# EAGLE board Control LED Brightness using UART Communication (EAGLE 9.7.0)

Size 219.42 x 117.08 mm. Coordinates in mm from the lower left corner, seen from the top.
Outline: 0,0 219.42,0 219.42,117.08 0,117.08 0,0
Copper layers (1*16): Top 0.035mm / dielectric 1.5mm / Bottom 0.035mm
Design rules "default": minimum track width 6mil, minimum drill 0.35mm, track to track 6mil, track to pad 6mil, pad to pad 6mil, via to via 6mil, smd to smd 6mil, copper to edge 40mil, drill to drill 6mil, minimum pad ring 10mil, minimum via ring 8mil, stop-mask expansion 4mil, vias tented up to drill 0mil, thermal gap 10mil

## Footprints (pad centres in the part's own frame; a part is rotated, then mirrored left to right if it is on the bottom)
LEDRD254W60D565H860B_B = drill 0.981 pad 1.581: 1 -1.27,0; 2 1.27,0
HA-06-SM065 = drill 1 pad 1.676: 1 -2.54,-2.54; 2 0,2.54; 3 2.54,-2.54
RESAD1016W63L850D250B = drill 0.83 pad 1.43: 1 -5.08,0; 2 5.08,0
ARDUINO-UNO-R3-SHIELD = drill 1.016 pad 1.88: 3.3V 24.13,-2.54; 5V 24.13,0; A0 24.13,12.7; A1 24.13,15.24; A2 24.13,17.78; A3 24.13,20.32; A4 24.13,22.86; A5 24.13,25.4; AREF -24.13,-13.97; D2 -24.13,20.32; D3 -24.13,17.78; D4 -24.13,15.24; D5 -24.13,12.7; D6 -24.13,10.16; D7 -24.13,7.62; D8 -24.13,3.81; D9 -24.13,1.27; D10 -24.13,-1.27; D11 -24.13,-3.81; D12 -24.13,-6.35; D13 -24.13,-8.89; GND@0 24.13,2.54; GND@1 24.13,5.08; GND@2 -24.13,-11.43; IOREF 24.13,-7.62; NC 24.13,-10.16; RES 24.13,-5.08; RX -24.13,25.4; SCL -24.13,-19.05; SDA -24.13,-16.51; TX -24.13,22.86; VIN 24.13,7.62

## Placement (x,y rotation side)
DLED  BLUE  [LEDRD254W60D565H860B_B]  115.53,109.17 180 top
RPOTPOTENTIOMETER  10k  [HA-06-SM065]  68.54,96.47 0 top
RRESISTOR  150  [RESAD1016W63L850D250B]  114.26,86.31 90 top
URECEIVER  ARDUINO-UNO-R3-SHIELD  [ARDUINO-UNO-R3-SHIELD]  184.9,29.84 270 top
UTRANSMITTER  ARDUINO-UNO-R3-SHIELD  [ARDUINO-UNO-R3-SHIELD]  47.88,30.13 270 top

## Library data of the parts
DLED = Tinkercad; CATEGORY: Opto-Electronic; SUB-CATEGORY: LED; VALUE: LED_BLUE
RPOTPOTENTIOMETER RRESISTOR URECEIVER UTRANSMITTER = Tinkercad

## Nets
DLED_C: DLED.2 RRESISTOR.2
URECEIVER_D11: DLED.1 URECEIVER.D11
UTRANSMITTER_5V: RPOTPOTENTIOMETER.3 URECEIVER.5V UTRANSMITTER.5V
UTRANSMITTER_A1: RPOTPOTENTIOMETER.2 UTRANSMITTER.A1
UTRANSMITTER_GND: RPOTPOTENTIOMETER.1 RRESISTOR.1 URECEIVER.GND@0 URECEIVER.GND@1 URECEIVER.GND@2 UTRANSMITTER.GND@0 UTRANSMITTER.GND@1 UTRANSMITTER.GND@2
UTRANSMITTER_RX: URECEIVER.TX UTRANSMITTER.RX
UTRANSMITTER_TX: URECEIVER.RX UTRANSMITTER.TX

## Tracks (layer width: path | path; a pad name or v marks a point on that pad's centre or on a via)
DLED_C  (1 unrouted)
URECEIVER_D11  (1 unrouted)
UTRANSMITTER_5V  (2 unrouted)
UTRANSMITTER_A1  (1 unrouted)
UTRANSMITTER_GND  (7 unrouted)
UTRANSMITTER_RX  (1 unrouted)
UTRANSMITTER_TX  (1 unrouted)